# Altium PCB IMUCube_Pcb.PcbDoc
Units mil, origin at the board's own origin, x right, y up, seen from the top; angles counter-clockwise.
Board outline 6905 x 5425 mil, 2 copper layers (Top Layer, Bottom Layer), stack 42.52 mil thick; 2 components, 31 nets, 9 pads, 0 vias.
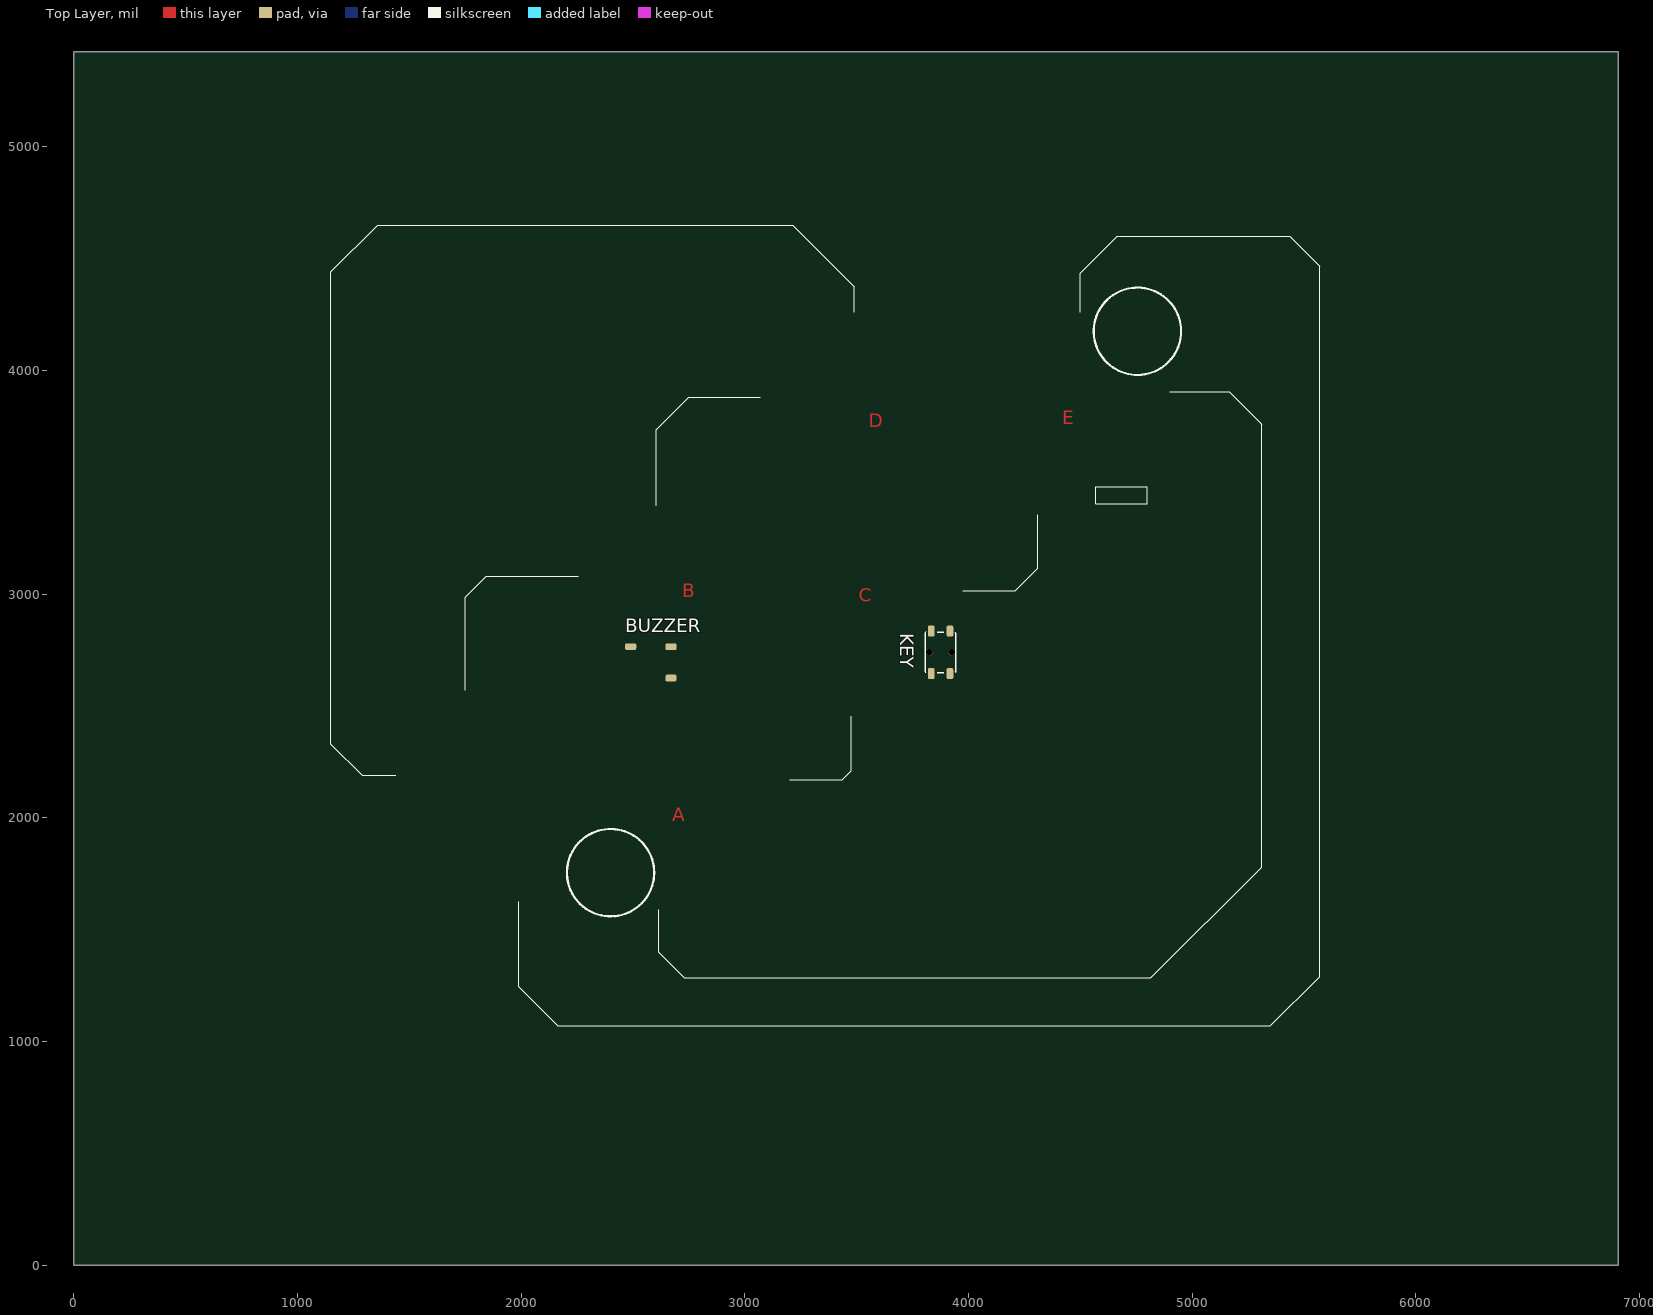
[diagram p0: Top Layer view]
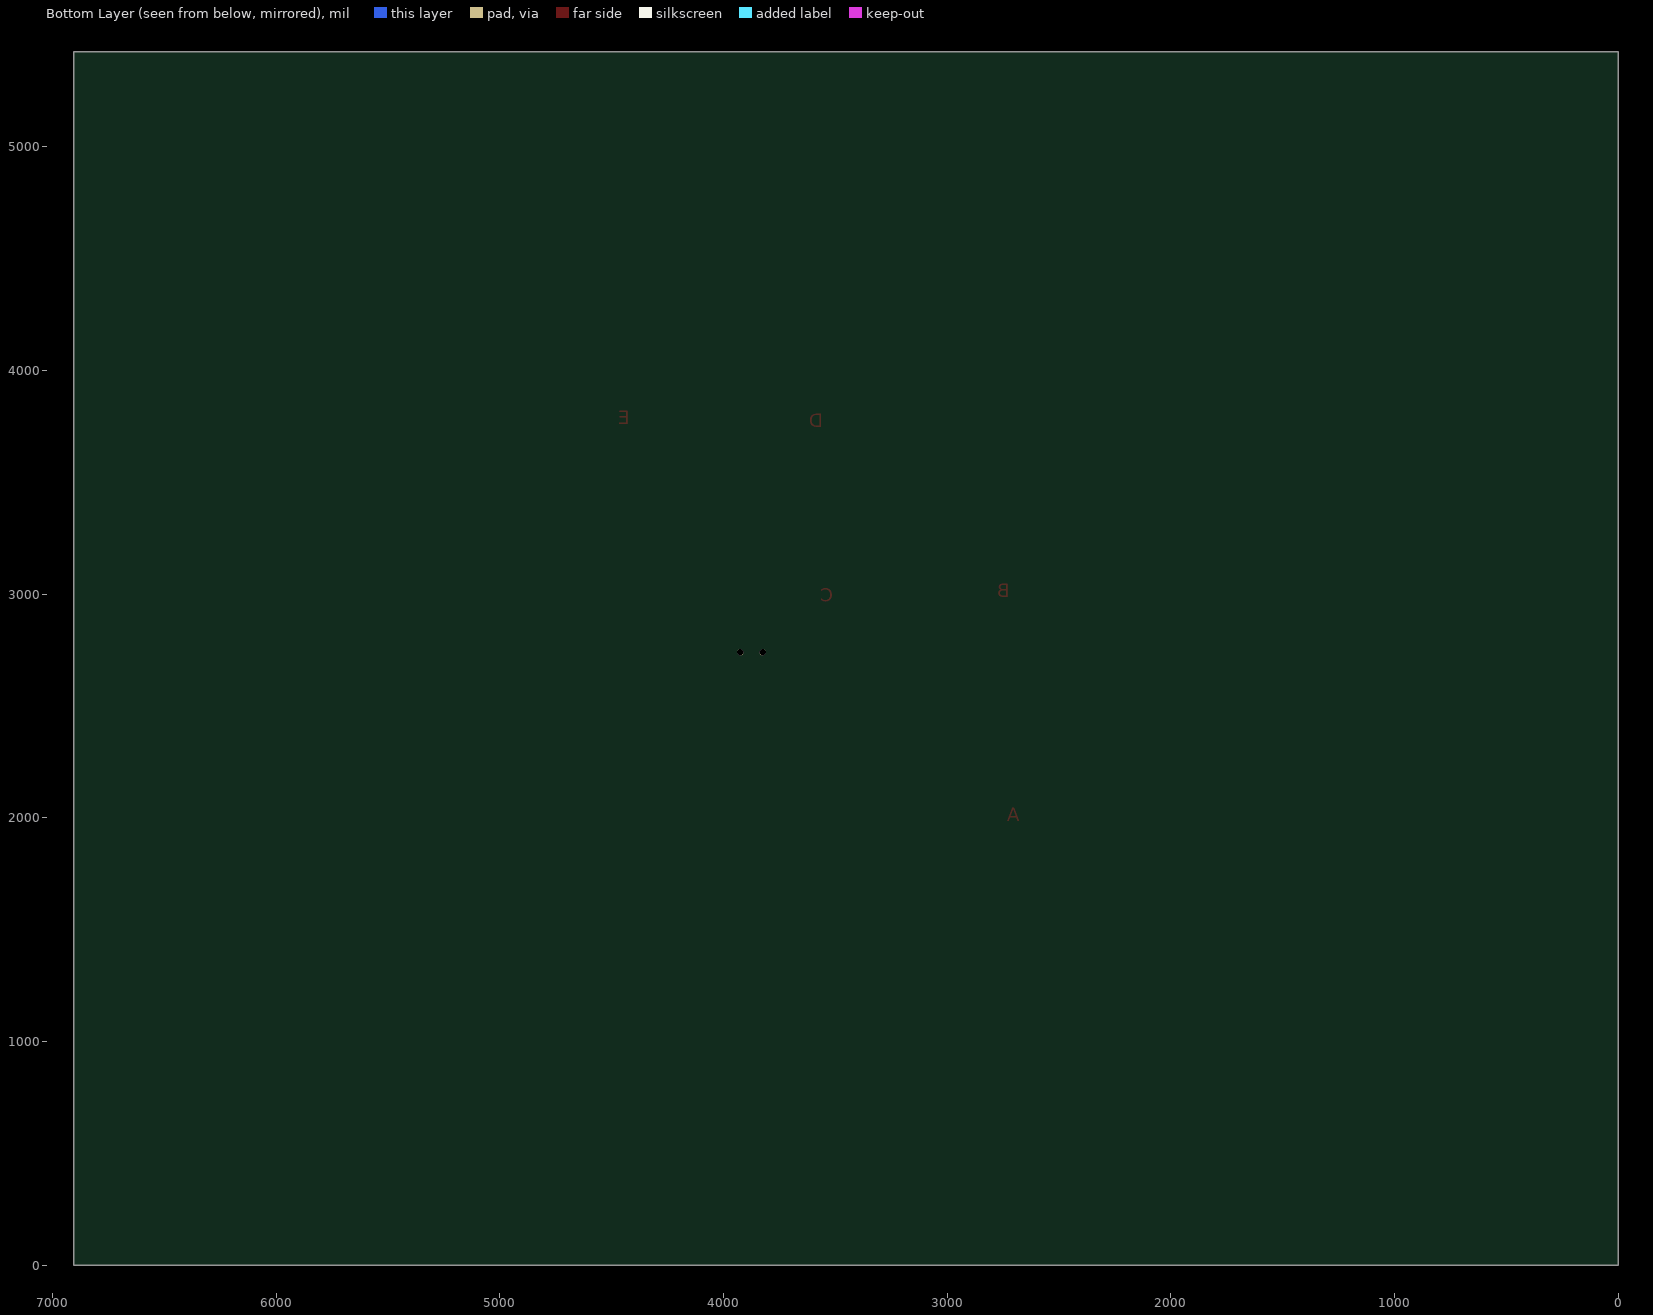
[diagram p1: Bottom Layer view, seen from below]

## Layer stack, top to bottom
Top Solder: solder mask 0.3937, Solder Resist, Dk 3.5
Top Layer: signal copper 1.5748
Dielectric 1: dielectric 39.3701, FR-4, Dk 4.2
Bottom Layer: signal copper 1.5748
Bottom Solder: solder mask 0.3937, Solder Resist, Dk 3.5

## Board outline
0,0 0,5425 6905,5425 6905,0

## Design rules (kind name [scope] priority, off if disabled: settings)
BoardOutlineClearance [All] p1: gap=0
Clearance ClearancePolygon [InPolygon] p1: gap=8
Clearance [All] p2: gap=6
ComponentClearance [All] p1: gap=0 collisioncheckmode=3 verticalgap=0 showdistances=FALSE
Height [All] p1: minheight=0 maxheight=5000 prefheight=500
HoleSize [All] p1: absolutevalues=TRUE maxlimit=200 minlimit=1 maxpercent=80.000 minpercent=20.000
HoleToHoleClearance [All] p1: gap=6 allowstackedmicrovias=TRUE
MinimumSolderMaskSliver [All] p1: minsoldermaskwidth=0
PolygonConnect [All] p1: connectstyle=Direct reliefconductorwidth=10 reliefentries=4 polygonreliefangle="90 Angle" airgapwidth=10
RoutingVias [All] p1: holewidth=12 width=24 viastyle="Through Hole" minholewidth=12 minwidth=20 maxholewidth=28 maxwidth=50
SilkToSilkClearance [All] p1: silktosilkclearance=0
SilkToSolderMaskClearance [IsPad] p1: minsilkscreentomaskgap=0 clearancetoexposedcopper=TRUE
SolderMaskExpansion [All] p1: expansion=2
Width [All] p1: maxlimit=50 minlimit=6 preferedwidth=10
23 further rules are at their usual default settings.

## Classes and differential pairs
component class IMUCubeCTRL_Sch: HDR

## Components (designator, comment, footprint, x,y, rotation, side; value= is the part's Value field where it differs from the comment)
BUZZER "Buzzer" Buzzer_5x5 2580,2700 r90 top
KEY "ButtonTACT" ButtonTACT_3.5*3.55_90 3875,2740 r270 top

## Footprints (in the part's own frame and the unit in brackets; to place one, negate y for a bottom-side part, rotate by r counter-clockwise, add the part's x,y. Pads: shape width x height; smd on the part's side, far side on the other; paste and mask are expansions set on the pad)
ButtonTACT_3.5*3.55_90 [mil]
  round 27.56 hole 27.56 mask+0: 0(-0.01,-50) 0(0,50)
  rrect50% 50x30 smd: 1(-95,42) 2(-95,-42) 3(95,42) 4(95,-42)
  silkscreen extent -91,-69 91,69, body extent -90,-55 91,85, height 56
Buzzer_5x5 [mil]
  rrect50% 30x50 smd: N(65,90) NC(-75,-90) P(65,-90)
  body extent -98,-98 98,98, height 106

## Part data
KEY: "Button"

## Nets (pads, with @x,y where several pads share a name; then routed paths per layer and width w, separated by ;. In a path a pad name is that pad's centre, name@x,y a point inside that pad or via, vN(x,y) a via of type N, cw(c..) or ccw(c..) an arc to the next point about the centre after c; other vN are vias at no path point)
3V3: 
AD_VBAT: 
BOT: 
CSM: 
DIN: 
DOUT: 
GND: 
INTM: 
NetC5_2: 
NetC13_1: 
NetSK1_2: 
NetSK2_2: 
NetSK3_2: 
NetSK4_2: 
NetSK5_2: 
NetSK6_2: 
NetSK7_2: 
NetSK8_2: 
NEXT: 
REG: 
RX: 
SCK: 
SDI: 
SDO: 
SWCLK: 
SWDIO: 
TX: 
VBAT: 
VIN: 
XT_I: 
XT_O: 
pads on no net: BUZZER.N BUZZER.NC BUZZER.P KEY.0 KEY.1 KEY.2 KEY.3 KEY.4

## Other copper
Top Layer:
  text "E" at 4420,3760 h60
  text "D" at 3555,3745 h60
  text "B" at 2720,2985 h60
  text "C" at 3510,2965 h60
  text "A" at 2675,1985 h60

## Silkscreen, mask and mechanical layers (free items; w line width, h text height)
Top Overlay:
  circle w10: c4755,4175 r195.26
  circle w10: c2400,1755 r195.26
  lines w2: 1440,2190 1290,2190 1150,2330 1150,4440 1360,4650 3215,4650 3490,4375 3490,4260 ; 1750,2570 1750,2985 1845,3080 2255,3080 ; 1990,1625 1990,1245 2165,1070 5350,1070 5570,1290 5570,4465 5435,4600 4665,4600 4500,4435 4500,4260 ; 2605,3395 2605,3735 2750,3880 3070,3880 ; 2615,1590 2615,1400 2730,1285 4815,1285 5310,1780 5310,3760 5165,3905 4900,3905 ; 3200,2170 3435,2170 3475,2210 3475,2455 ; 3975,3015 4210,3015 4310,3115 4310,3355 ; 4570,3405 4570,3480 4800,3480 4800,3405 4570,3405
Mechanical 1:
  lines w2: 0,0 0,5425 6905,5425 6905,0 0,0 ; 1481.3,2068.31 1481.3,2335.16 1520.67,2335.16 1520.67,2478.7 1616.54,2478.7 1616.54,2439.33 1900,2439.33 1900,2478.7 2229.33,2478.7 2229.33,2101.69 2268.7,2101.69 2370.67,2101.69 2370.67,2110 2331.3,2110 2331.3,2439.33 2708.31,2439.33 2708.31,2478.7 2708.31,2580.67 2700,2580.67 2700,2541.3 2370.67,2541.3 2370.67,2570.67 2390,2590 2435,2590 2435,2900 2388.98,2900 2370.67,2918.31 2331.3,2918.31 2331.3,3185.16 2370.67,3185.16 2370.67,3328.7 2466.54,3328.7 2466.54,3289.33 2750,3289.33 2750,3328.7 3079.33,3328.7 3079.33,2951.69 3118.7,2951.69 3220.67,2951.69 3220.67,2960 3181.3,2960 3181.3,3289.33 3558.31,3289.33 3558.31,3328.7 3558.31,3430.67 3550,3430.67 3550,3391.3 3220.67,3391.3 3220.67,3768.31 3181.3,3768.31 3181.3,4035.16 3220.67,4035.16 3220.67,4178.7 3316.54,4178.7 3316.54,4139.33 3600,4139.33 3600,4178.7 3929.33,4178.7 3929.33,3801.69 3968.7,3801.69 4070.67,3801.69 4070.67,3810 4031.3,3810 4031.3,4060 4408.31,4060 4408.31,4178.7 4675.16,4178.7 4675.16,4139.33 4818.7,4139.33 4818.7,4043.46 4779.33,4043.46 4779.33,3760 4818.7,3760 4818.7,3430.67 4441.69,3430.67 4441.69,3391.3 4174.84,3391.3 4174.84,3430.67 4031.3,3430.67 4031.3,3526.54 4070.67,3526.54 4070.67,3534.84 3968.7,3534.84 3929.33,3534.84 3929.33,3391.3 3833.46,3391.3 3833.46,3430.67 3825.16,3430.67 3825.16,3328.7 3825.16,3289.33 3968.7,3289.33 3968.7,3193.46 3929.33,3193.46 3929.33,2910 3968.7,2910 3968.7,2580.67 3591.69,2580.67 3591.69,2541.3 3324.84,2541.3 3324.84,2580.67 3181.3,2580.67 3181.3,2676.54 3220.67,2676.54 3220.67,2684.84 3118.7,2684.84 3079.33,2684.84 3079.33,2541.3 2983.46,2541.3 2983.46,2580.67 2975.16,2580.67 2975.16,2478.7 2975.16,2439.33 3118.7,2439.33 3118.7,2343.46 3079.33,2343.46 3079.33,2060 3118.7,2060 3118.7,1730.67 2741.69,1730.67 2741.69,1691.3 2474.84,1691.3 2474.84,1730.67 2331.3,1730.67 2331.3,1826.54 2370.67,1826.54 2370.67,1834.84 2268.7,1834.84 2229.33,1834.84 2229.33,1691.3 2133.46,1691.3 2133.46,1730.67 1850,1730.67 1850,1691.3 1520.67,1691.3 1520.67,2068.31 1481.3,2068.31 ; 2233.7,3681.93 2233.7,3681.93